# EAGLE board LAMPS (EAGLE 6.3)
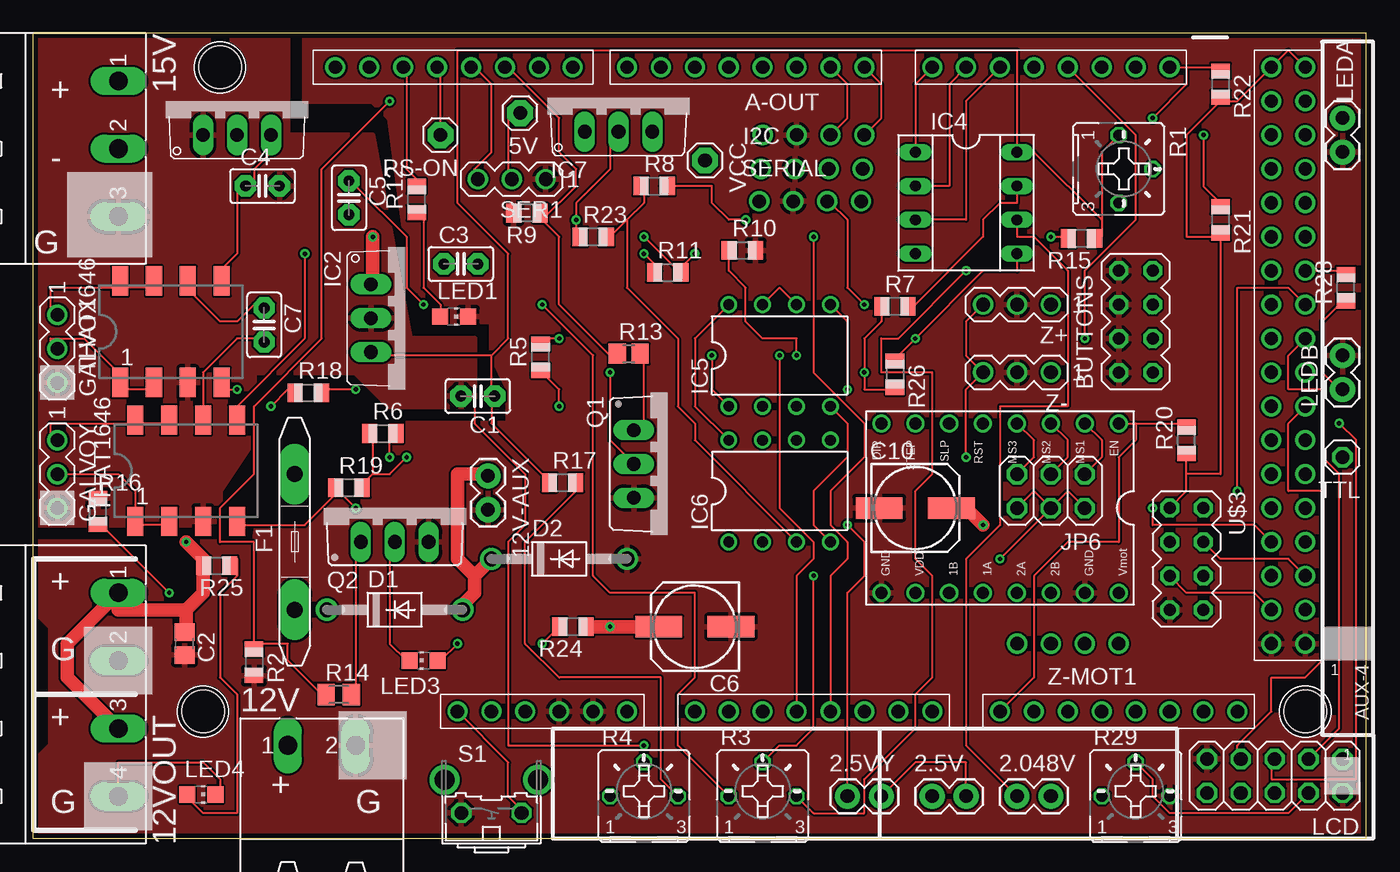
[diagram p0: board, top side]
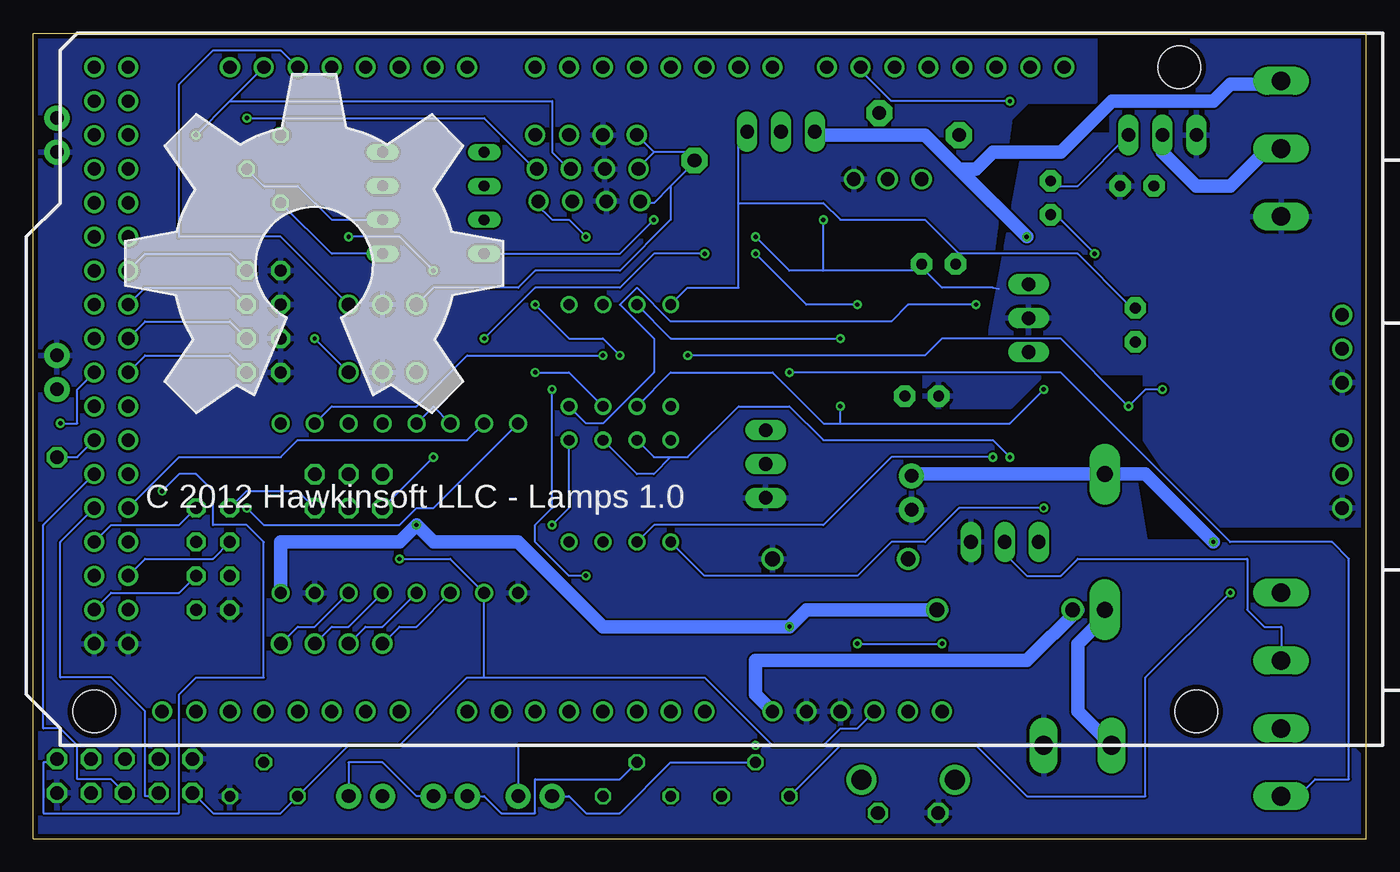
[diagram p1: board, bottom side, seen from below]

Size 99.82 x 60.32 mm. Coordinates in mm from the lower left corner, seen from the top.
Outline: 99.82,60.31 99.82,0 0,0 0,60.31
Outline: 99.82,60.32 0.01,60.32
Copper layers (1*16): Top 0.0356mm / dielectric 1.5011mm / Bottom 0.0356mm
Design rules "LaenPCBOrder": minimum track width 6mil, minimum drill 13mil, track to track 6mil, track to pad 6mil, pad to pad 6mil, via to via 6mil, smd to smd 6mil, copper to edge 15mil, drill to drill 6mil, minimum pad ring 7mil, minimum via ring 7mil, stop-mask expansion 4mil, vias tented up to drill 0mil, thermal gap 10mil
Net classes: 1 power: width 1.016 mm

## Footprints (pad centres in the part's own frame; a part is rotated, then mirrored left to right if it is on the bottom)
1X02 = drill 1.016 pad 1.88: 1 0,0; 2 2.54,0
1X01 = drill 1.016 pad 1.93 octagon: 1 0,0
MSTBA2 = drill 1.397 long: 1 -2.54,5.08; 2 2.54,5.08
MSTBA4 = drill 1.397 long: 1 -7.62,5.08; 2 -2.54,5.08; 3 2.54,5.08; 4 7.62,5.08
MSTBA3 = drill 1.397 long: 1 -5.08,5.08; 2 0,5.08; 3 5.08,5.08
TO220V = drill 1.016 long: 1 -2.54,-2.54; 2 0,-2.54; 3 2.54,-2.54
1X04 = drill 1.016: 1 -2.54,0; 2 0,0; 3 2.54,0; 4 5.08,0
2X4 = drill 0.9 pad 1.422 octagon: 1 -3.81,-1.27; 2 -3.81,1.27; 3 -1.27,-1.27; 4 -1.27,1.27; 5 1.27,-1.27; 6 1.27,1.27; 7 3.81,-1.27; 8 3.81,1.27
C2.5-2 = drill 0.813 pad 1.6 octagon: 1 -1.27,0; 2 1.27,0
C0805 = smd 1.3 x 1.5: 1 -0.85,0; 2 0.85,0
153CLV-0605 = smd 3.5 x 1.6: + 2.7,0; - -2.7,0
DO41-10 = drill 1.118: A 5.08,0; C -5.08,0
MFR500 = drill 1.2 pad 2.3 long: 1 -5.08,0; 2 5.08,0
3PIN-HEADER = drill 1.016: 1 -2.54,0; 2 0,0; 3 2.54,0
SOCKET-08 = drill 0.813 long: 1 -3.81,-3.81; 2 -1.27,-3.81; 3 1.27,-3.81; 4 3.81,-3.81; 5 3.81,3.81; 6 1.27,3.81; 7 -1.27,3.81; 8 -3.81,3.81
DIL08 = drill 0.813 pad 1.27: 1 -3.81,-3.81; 2 -1.27,-3.81; 3 1.27,-3.81; 4 3.81,-3.81; 5 3.81,3.81; 6 1.27,3.81; 7 -1.27,3.81; 8 -3.81,3.81
2X03 = drill 1.016 octagon: 1 -2.54,-1.27; 2 -2.54,1.27; 3 0,-1.27; 4 0,1.27; 5 2.54,-1.27; 6 2.54,1.27
2X05 = drill 1.016 octagon: 1 -5.08,-1.27; 2 -5.08,1.27; 3 -2.54,-1.27; 4 -2.54,1.27; 5 0,-1.27; 6 0,1.27; 7 2.54,-1.27; 8 2.54,1.27; 9 5.08,-1.27; 10 5.08,1.27
CHIP-LED0805 = smd 1.2 x 1.2: A 0,-1.05; C 0,1.05
TO220BV = drill 1.016 long: D 0,-2.54; G -2.54,-2.54; S 2.54,-2.54
B25P = drill 0.813 octagon: A -2.54,0; E 2.54,0; S 0,2.54
R0805 = smd 1.1 x 1.4: 1 -1,0; 2 1,0
R0805' = smd 1.3 x 1.5: 1 -0.85,0; 2 0.85,0
M0805 = smd 1.3 x 1.6: 1 -0.95,0; 2 0.95,0
B3F-31XX = drill 1.016 octagon: 1 -2.261,-1.245; 2 2.261,-1.245 | drill 1.499 pad 2.159: 3 -3.505,1.245; 4 3.505,1.245
1X01' = drill 1.016 octagon: 1 0,0
ARDUINO_MEGA_SHIELD = drill 1 pad 1.422: 3.3V 35.56,2.54; 5V@0 38.1,2.54; 5V@1 93.98,50.8; 5V@2 96.52,50.8; A0 50.8,2.54; A1 53.34,2.54; A2 55.88,2.54; A3 58.42,2.54; A4 60.96,2.54; A5 63.5,2.54; A6 66.04,2.54; A7 68.58,2.54; A8 73.66,2.54; A9 76.2,2.54; A10 78.74,2.54; A11 81.28,2.54; A12 83.82,2.54; A13 86.36,2.54; A14 88.9,2.54; A15 91.44,2.54; AREF 23.876,50.8; D2 58.42,50.8; D3 55.88,50.8; D4 53.34,50.8; D5 50.8,50.8; D6 48.26,50.8; D7 45.72,50.8; D8 41.656,50.8; D9 39.116,50.8; D10 36.576,50.8; D11 34.036,50.8; D12 31.496,50.8; D13 28.956,50.8; D14 68.58,50.8; D15 71.12,50.8; D16 73.66,50.8; D17 76.2,50.8; D18 78.74,50.8; D19 81.28,50.8; D20 83.82,50.8; D21 86.36,50.8; D22 93.98,48.26; D23 96.52,48.26; D24 93.98,45.72; D25 96.52,45.72; D26 93.98,43.18; D27 96.52,43.18; D28 93.98,40.64; D29 96.52,40.64; D30 93.98,38.1; D31 96.52,38.1; D32 93.98,35.56; D33 96.52,35.56; D34 93.98,33.02; D35 96.52,33.02; D36 93.98,30.48; D37 96.52,30.48; D38 93.98,27.94; D39 96.52,27.94; D40 93.98,25.4; D41 96.52,25.4; D42 93.98,22.86; D43 96.52,22.86; D44 93.98,20.32; D45 96.52,20.32; D46 93.98,17.78; D47 96.52,17.78; D48 93.98,15.24; D49 96.52,15.24; D50 93.98,12.7; D51 96.52,12.7; D52 93.98,10.16; D53 96.52,10.16; GND@0 40.64,2.54; GND@1 43.18,2.54; GND@2 26.416,50.8; GND@3 93.98,7.62; GND@4 96.52,7.62; RES 33.02,2.54; RX 63.5,50.8; TX 60.96,50.8; VIN 45.72,2.54 | hole 3.2: 96.52,2.54; 13.97,2.54; 15.24,50.8
THAT1646 = smd 1.2 x 2.2: 1 -3.81,-3.8; 2 -1.27,-3.8; 3 1.27,-3.8; 4 3.81,-3.8; 5 3.81,3.8; 6 1.27,3.8; 7 -1.27,3.8; 8 -3.81,3.8
A4988BREAKOUT = drill 0.9: 1A 8.89,1.27; 1B 11.43,1.27; 2A 6.35,1.27; 2B 3.81,1.27; DIR 16.51,-11.43; EN -1.27,-11.43; GND 16.51,1.27; GND@0 1.27,1.27; MS1 1.27,-11.43; MS2 3.81,-11.43; MS3 6.35,-11.43; RST 8.89,-11.43; SLP 11.43,-11.43; STEP 13.97,-11.43; VDD 13.97,1.27; VMOT -1.27,1.27

## Placement (x,y rotation side)
2.5V  [1X02]  67.32,3.17 0 top
2.5VY  [1X02]  60.97,3.17 0 top
2.048V  [1X02]  73.67,3.17 0 top
5V  [1X01]  36.46,54.36 180 top
12V  MSTBA2  [MSTBA2]  21.6,1.9 0 top
12V-AUX  [1X02]  34.05,27.18 270 top
12VOUT  MSTBA4  [MSTBA4]  1.28,10.79 270 top
15V  MSTBA3  [MSTBA3]  1.28,51.69 270 top
!!!SCHEMATICDOESNOTREFLECTDESIGN  7906  [TO220V]  15.25,55.24 0 top
A-OUT  [1X04]  57.16,52.7 0 top
BUTTONS  M04X2  [2X4]  82.56,38.73 90 top
C1  0.1uF  [C2.5-2]  33.29,33.15 180 top
C2  100nF  [C0805]  11.32,14.6 270 top
C3  0.1uF  [C2.5-2]  32.02,43.05 0 top
C4  0.1uF  [C2.5-2]  17.16,48.89 0 top
C5  1uF  [C2.5-2]  23.63,48.01 270 top
C6  100uF  [153CLV-0605]  49.54,15.87 180 top
C7  1uF  [C2.5-2]  17.28,38.48 270 top
C10  100uF  [153CLV-0605]  66.05,24.77 0 top
D1  1N4004  [DO41-10]  27.06,17.14 0 top
D2  1N4004  [DO41-10]  39.38,20.95 0 top
F1  MFR500  [MFR500]  19.57,22.23 270 top
GALVOX  [3PIN-HEADER]  1.79,36.7 270 top
GALVOY  [3PIN-HEADER]  1.79,27.3 270 top
I2C  [1X04]  57.04,50.16 0 top
IC2  7805TV  [TO220V]  27.83,38.99 270 top
IC4  TLV5618  [SOCKET-08]  69.86,47.62 270 top
IC5  TL082P  [DIL08]  55.89,36.2 0 top
IC6  TL082P  [DIL08]  55.89,26.03 0 top
IC7  7806TV  [TO220V]  43.83,55.5 0 top
JP6  [2X03]  76.21,26.03 180 top
LCD  [2X05]  92.98,4.7 180 top
LED1  [CHIP-LED0805]  31.51,39.12 270 top
LED3  [CHIP-LED0805]  29.22,13.33 90 top
LED4  [CHIP-LED0805]  12.59,3.3 270 top
LEDA  [1X02]  98.06,53.97 270 top
LEDB  [1X02]  98.06,33.65 90 top
PS-ON  [1X01]  30.49,52.7 180 top
Q1  STP55NF06L  [TO220BV]  47.51,28.07 270 top
Q2  STP55NF06L  [TO220BV]  27.06,24.77 0 top
R1  20k  [B25P]  81.29,50.16 270 top
R2  100k  [R0805]  16.52,13.21 270 top
R3  1k  [B25P]  54.62,3.17 0 top
R4  1k  [B25P]  45.73,3.17 0 top
R5  100k  [R0805]  37.99,36.07 90 top
R6  100k  [R0805]  26.17,30.35 0 top
R7  100k  [R0805]  64.53,39.88 0 top
R8  100k  [R0805]  46.49,48.89 0 top
R9  100k  [R0805]  36.97,46.86 180 top
R10  100k  [R0805]  53.1,44.07 0 top
R11  10k  [R0805]  47.51,42.42 0 top
R12  1K  [R0805]  28.71,47.88 90 top
R13  10r  [R0805']  44.59,36.32 0 top
R14  10r  [M0805]  22.87,10.79 0 top
R15  10k  [R0805]  78.5,44.96 180 top
R16  10k  [R0805]  4.84,24.51 90 top
R17  10k  [R0805]  39.64,26.67 0 top
R18  200k  [R0805]  20.59,33.4 0 top
R19  200k  [R0805]  23.63,26.29 0 top
R20  10k  [R0805]  86.37,29.84 90 top
R21  4.7K  [R0805]  88.91,46.35 270 top
R22  4.7K  [R0805]  88.91,56.51 270 top
R23  200k  [R0805]  41.92,45.09 0 top
R24  1.8K  [R0805]  40.4,15.87 180 top
R25  1.8K  [R0805]  13.73,20.45 0 top
R26  200k  [R0805]  64.53,34.8 270 top
R28  1K  [R0805]  98.31,41.27 90 top
R29  1k  [B25P]  82.56,3.17 0 top
S1  [B3F-31XX]  34.3,3.17 0 top
SER1  [3PIN-HEADER]  35.83,49.4 180 top
SERIAL  [1X04]  56.91,47.75 0 top
TTL  [1X01']  98.06,28.57 180 top
U1  ARDUINO_MEGA_SHIELD  [ARDUINO_MEGA_SHIELD]  -1.26,6.98 0 top
U$1  THAT1646  [THAT1646]  10.3,37.97 0 top
U$2  [OSHW_FILLX1000_NOTEXT]  92.98,31.88 0 bottom
U$3  M04X2  [2X4]  86.37,20.95 270 top
U$4  THAT1646  [THAT1646]  11.44,27.56 0 top
U$8  A4988BREAKOUT  [A4988BREAKOUT]  80.02,19.69 180 top
VCC  [1X01]  50.3,50.8 270 top
Z+  [3PIN-HEADER]  73.67,40 180 top
Z-  [3PIN-HEADER]  73.67,34.92 180 top
Z-MOT1  [1X04]  78.75,14.6 180 top

## Library data of the parts
2.5V 2.5VY 2.048V 12V-AUX BUTTONS LEDA LEDB U$3 = SparkFun; OC_NEWARK: unknown
5V C6 C10 PS-ON R2 R5-R12 R15-R26 R28 VCC = adafruit; OC_NEWARK: unknown
12V = con-phoenix-508; MF: FARNELL; MPN: 1757242; OC_FARNELL: 3705171; OC_NEWARK: 71C4161
12VOUT = con-phoenix-508; OC_FARNELL: 3705195; OC_NEWARK: unknown
15V = con-phoenix-508; MF: FARNELL; MPN: 1757255; OC_FARNELL: 3705183; OC_NEWARK: 71C4162
!!!SCHEMATICDOESNOTREFLECTDESIGN = linear; MPN: KA7906TU; OC_NEWARK: 94M7930
A-OUT F1 I2C SERIAL U1 U$8 Z-MOT1 = RepRapjr; OC_NEWARK: unknown
C1 C3-C5 C7 = capacitor-wima; OC_NEWARK: unknown
C2 R13 R14 = resistor; OC_NEWARK: unknown
D1 D2 = diode; OC_NEWARK: unknown
GALVOX GALVOY SER1 Z+ Z- = ultimachine; OC_NEWARK: unknown
IC2 IC5-IC7 = linear; OC_NEWARK: unknown
IC4 = ic-package; MF: TEXAS INSTRUMENT CONNECTORS; MPN: TLV5618AIP; OC_NEWARK: 76C8920
JP6 LCD TTL = pinhead; OC_NEWARK: unknown
LED1 LED3 LED4 = led; OC_NEWARK: unknown
Q1 Q2 = transistor-power; MF: INTERNATIONAL RECTIFIER(IR); MPN: IRF1010EZPBF; OC_NEWARK: 63J7168
R1 R3 R4 R29 = pot; OC_NEWARK: unknown
S1 = switch-omron; OC_FARNELL: 959704; OC_NEWARK: unknown
U$1 U$4 = THAT1646; MPN: THAT1646P08-U; OC_NEWARK: 50M5186
U$2 = ohw-logo

## Nets
+5V: 5V.1 SER1.2
+12V [power]: 12V-AUX.1 12VOUT.1 12VOUT.3 C2.1 C6.+ C10.+ D1.A D2.C F1.1 R24.1 R25.1 U$8.VMOT
A3: SERIAL.3 U1.A3
A4: SERIAL.4 U1.A4
A5: U1.A5
A9: U1.A9
A10: U1.A10
A11: U1.A11
A12: U1.A12
AM-VIN [power]: D1.C U1.VIN
D1: A-OUT.4 U1.RX
D2: A-OUT.3 U1.TX
D4: U1.D4
D5: U1.D5
D6: U1.D6
D8: U1.D8
D9: R2.1 R14.1 U1.D9
D10: R9.1 R13.1 U1.D10
D11: SER1.3 U1.D11
D12: PS-ON.1 U1.D12
D14: IC4.1 U1.D14
D15: IC4.2 U1.D15
D16: IC4.3 U1.D16
D17: U1.D17
D23: U1.D23
D25: U1.D25
D27: U1.D27
D29: U1.D29
D31: U1.D31
D32: BUTTONS.7 U1.D32
D33: R28.2 U1.D33
D34: BUTTONS.5 U1.D34
D35: LCD.1 U1.D35
D36: BUTTONS.3 U1.D36
D37: LCD.3 U1.D37
D38: BUTTONS.1 U1.D38
D39: LCD.5 U1.D39
D40: U1.D40
D41: LCD.7 U1.D41
D42: U1.D42
D43: TTL.1 U1.D43
D44: U1.D44
D45: LCD.6 U1.D45
D47: LCD.8 U1.D47
D49: U1.D49 U$3.2
D53: U1.D53 U$3.6
E0-DIR: U1.D28
E0-EN: U1.D24
E0-STEP: U1.D26
E1-EN: U1.D30
GND: 12V-AUX.2 12V.2 A-OUT.2 BUTTONS.2 BUTTONS.4 BUTTONS.6 BUTTONS.8 C2.2 C6.- C10.- D2.A I2C.2 LCD.2 LCD.9 LED1.C LEDA.2 LEDB.2 Q1.S Q2.S R2.2 R9.2 R10.2 R29.E S1.1 SER1.1 SERIAL.2 U1.GND@0 U1.GND@1 U1.GND@3 U1.GND@4 U$3.7 U$8.GND U$8.GND@0 Z+.2 Z-.2
GND_0: 2.5V.2 2.5VY.2 2.048V.2 15V.3 !!!SCHEMATICDOESNOTREFLECTDESIGN.1 C1.2 C3.2 C4.2 GALVOX.3 GALVOY.3 IC2.2 IC4.5 IC7.2 R1.E R11.2 R16.2 R23.1 R26.1 U$1.3 U$4.3
LED: R12.2 U1.D13
MISO: U1.D50 U$3.3
MOSI: U1.D51 U$3.4
N$1: 12VOUT.2 LED3.C Q2.D
N$2 [power]: 15V.1 IC2.1 IC7.1
N$3 [power]: 15V.2 !!!SCHEMATICDOESNOTREFLECTDESIGN.2
N$4: R4.A R16.1
N$5: R4.E R17.2
N$6: 2.048V.1 IC4.6 R1.S
N$7: 12VOUT.4 LED4.C Q1.D
N$8: R3.A R11.1
N$9: R3.E R15.2
N$10: 2.5VY.1 IC6.5 R4.S
N$11: 2.5V.1 IC5.5 R3.S
N$12: GALVOX.2 U$1.1 U$1.2
N$13: GALVOX.1 U$1.7 U$1.8
N$14: IC5.6 IC5.7 R5.2
N$15: IC5.2 R5.1 R18.2
N$16: IC4.7 R7.2
N$17: IC5.3 R7.1 R26.2
N$18: IC6.6 IC6.7 R6.2
N$20: IC6.2 R6.1 R19.2
N$21: IC4.4 R8.2
N$22: IC6.3 R8.1 R23.2
N$23: LEDB.1 R28.1
N$24: GALVOY.2 U$4.1 U$4.2
N$25: GALVOY.1 U$4.7 U$4.8
N$29: LCD.4 R29.S
N$37: JP6.3 U$8.MS2
N$38: U$8.RST U$8.SLP
N$39: JP6.5 U$8.MS3
N$40: JP6.1 R10.1 U$8.MS1
N$41: U$8.2B Z-MOT1.1
N$42: U$8.2A Z-MOT1.2
N$43: U$8.1A Z-MOT1.3
N$44: U$8.1B Z-MOT1.4
N$45: LED3.A R24.2
N$46: LED1.A R12.1
N$47: Q2.G R14.2
N$48: Q1.G R13.2
N$50: LED4.A R25.2
N$54 [power]: 12V.1 F1.2
NEG_6V: !!!SCHEMATICDOESNOTREFLECTDESIGN.3 C4.1 C5.1 IC5.4 IC6.4 U$1.5
POS_5V: C1.1 IC2.3 IC4.8 R1.A R15.1 R17.1
POS_6V: C3.1 C7.1 IC5.8 IC6.8 IC7.3 U$1.6
RESET: S1.2 U1.RES
SCK: U1.D52 U$3.5
SCL: I2C.4 R22.1 U1.D21
SDA: I2C.3 R21.1 U1.D20
T2_5: C5.2 U$4.5
T2_6: C7.2 U$4.6
THERM0: U1.A13
THERM1: U1.A14
THERM2: U1.A15
VCC: A-OUT.1 I2C.1 JP6.2 JP6.4 JP6.6 LCD.10 R20.1 R21.2 R22.2 R29.A SERIAL.1 U1.5V@0 U1.5V@1 U1.5V@2 U$3.1 U$8.VDD VCC.1 Z+.3 Z-.3
X-DIR: U1.A1
X-MAX: U1.D2
X-MIN: U1.D3
X-STEP: U1.A0
X_IN: IC5.1 R18.1 U$1.4
Y-DIR: U1.A7
Y-EN: U1.A2
Y-STEP: U1.A6
Y_IN: IC6.1 R19.1 U$4.4
Z-DIR: U1.D48 U$8.DIR
Z-EN: R20.2 U1.A8 U$8.EN
Z-MAX: U1.D19 Z+.1
Z-MIN: U1.D18 Z-.1
Z-STEP: U1.D46 U$8.STEP

## Tracks (layer width: path | path; a pad name or v marks a point on that pad's centre or on a via)
+5V
  Top 0.152: SER1.2 35.57,48.89 35.57,53.97 5V.1
+12V  (via drill 0.33)
  Top 1.016: v71.13,23.49 69.86,24.77 C10.+ | 12.71,20.95 12.71,18.41 11.44,17.14 | 11.44,17.14 11.44,15.87 C2.1 | 11.44,17.14 6.36,17.14 12VOUT.1 2.55,14.6 2.55,12.06 12VOUT.3 | C6.+ v43.19,15.87 R24.1 | 33.03,19.69 33.03,18.41 31.76,17.14 D1.A | D2.C 33.03,19.69 | 33.03,19.69 31.76,20.95 31.76,27.3 34.3,27.3 12V-AUX.1 | v11.44,22.23 12.71,20.95 | 12.71,20.95 R25.1
  Bottom 1.016: U$8.VMOT 81.29,22.23 72.4,22.23 v71.13,23.49 69.86,22.23 63.51,22.23 57.16,15.87 v43.19,15.87 41.92,17.14 D1.A 31.76,17.14 | 12V-AUX.1 34.3,27.3 F1.1 16.52,27.3 v11.44,22.23
A3  (via drill 0.33)
  Top 0.152: U1.A3 57.16,19.69 58.43,20.95 58.43,22.23 55.89,24.77 v55.89,36.2 | v62.24,40 60.97,41.27 60.97,46.35 59.7,47.62 SERIAL.3
  Bottom 0.152: v55.89,36.2 57.16,37.46 59.7,37.46 v62.24,40
A4  (via drill 0.33)
  Top 0.152: U1.A4 59.7,19.69 60.97,20.95 60.97,22.23 59.7,23.49 59.7,26.03 62.24,28.57 62.24,31.11 58.43,34.92 v58.43,45.09
  Bottom 0.152: v58.43,45.09 59.7,46.35 60.97,46.35 62.24,47.62 SERIAL.4
AM-VIN
  Bottom 1.016: U1.VIN 45.73,10.79 45.73,13.33 25.41,13.33 21.6,17.14 D1.C
D1
  Top 0.152: U1.RX 63.51,56.51 63.51,53.97 A-OUT.4
D2
  Top 0.152: U1.TX 60.97,56.51 60.97,53.97 A-OUT.3
D9  (via drill 0.33)
  Top 0.152: 16.52,14.6 19.06,14.6 19.06,13.33 21.6,10.79 R14.1 | v26.68,55.24 21.6,50.16 21.6,37.46 16.52,32.38 16.52,27.3 13.98,24.77 13.98,22.23 16.52,22.23 16.52,14.6 | 16.52,14.6 R2.1
  Bottom 0.152: v26.68,55.24 35.57,55.24 38.11,57.79 U1.D9
D10
  Top 0.152: 38.11,46.35 39.38,45.09 39.38,40 43.19,36.2 R13.1 | 38.11,46.35 40.65,48.89 40.65,50.16 39.38,51.43 39.38,53.97 35.57,57.79 U1.D10 | 38.11,46.35 R9.1
D11
  Top 0.152: U1.D11 33.03,57.79 34.3,56.51 34.3,51.43 33.03,50.16 33.03,48.89 SER1.3
D12
  Top 0.152: PS-ON.1 30.49,57.79 U1.D12
D14
  Top 0.152: IC4.1 66.05,56.51 U1.D14
D15
  Top 0.152: IC4.2 68.59,48.89 68.59,56.51 U1.D15
D16
  Top 0.152: IC4.3 69.86,46.35 69.86,55.24 U1.D16
D32
  Bottom 0.152: BUTTONS.7 85.1,43.81 91.45,43.81 U1.D32
D33
  Top 0.152: U1.D33 97.8,42.54 R28.2
D34
  Bottom 0.152: BUTTONS.5 85.1,41.27 91.45,41.27 U1.D34
D35  (via drill 0.33)
  Top 0.152: U1.D35 93.99,41.27 90.18,41.27 v90.18,26.03
  Bottom 0.152: v90.18,26.03 88.91,27.3 87.64,27.3 86.37,26.03 86.37,23.49 83.83,23.49 82.56,22.23 82.56,12.06 87.64,12.06 88.91,10.79 88.91,1.9 99.07,1.9 99.07,5.71 97.8,5.71 LCD.1
D36
  Bottom 0.152: BUTTONS.3 85.1,38.73 91.45,38.73 U1.D36
D37
  Top 0.152: U1.D37 93.99,36.2 93.99,33.65 96.53,33.65 96.53,28.57 97.8,27.3 97.8,8.26 LCD.3 95.26,5.71
D38
  Bottom 0.152: BUTTONS.1 85.1,36.2 91.45,36.2 U1.D38
D39  (via drill 0.33)
  Top 0.152: v97.8,31.11 99.07,29.84 99.07,4.44 92.72,4.44 92.72,5.71 LCD.5
  Bottom 0.152: U1.D39 96.53,33.65 96.53,31.11 v97.8,31.11
D41
  Top 0.152: U1.D41 93.99,31.11 93.99,26.03 96.53,26.03 96.53,13.33 95.26,12.06 92.72,12.06 92.72,9.53 90.18,6.98 90.18,5.71 LCD.7
D43
  Bottom 0.152: U1.D43 96.53,28.57 TTL.1
D45
  Bottom 0.152: U1.D45 99.07,23.49 99.07,8.26 97.8,8.26 96.53,6.98 96.53,4.44 93.99,4.44 LCD.6 92.72,3.17
D47
  Bottom 0.152: U1.D47 97.8,22.23 97.8,12.06 93.99,12.06 91.45,9.53 91.45,3.17 90.18,3.17 LCD.8
D49
  Bottom 0.152: U$3.2 88.91,23.49 93.99,23.49 U1.D49
D53
  Bottom 0.152: U$3.6 88.91,18.41 93.99,18.41 U1.D53
GND
  pour Top: 100.34,60.32 20.33,60.32 20.33,55.24 25.41,55.24 26.68,53.97 28.71,38.73 34.3,38.73 34.3,36.2 35.57,33.65 35.57,31.11 26.68,31.11 22.87,33.65 17.79,33.65 17.79,29.84 16.52,22.23 -1.26,22.23 -1.26,18.41 1.28,15.87 1.28,6.98 -1.26,4.44 -1.26,-0.64 100.34,-0.64
  pour Bottom: 100.34,60.32 20.33,60.32 20.33,55.24 25.41,55.24 26.68,53.97 28.71,38.73 34.3,38.73 34.3,36.2 35.57,33.65 35.57,31.11 26.68,31.11 22.87,33.65 17.79,33.65 17.79,29.84 16.52,22.23 -1.26,22.23 -1.26,18.41 1.28,15.87 1.28,6.98 -1.26,4.44 -1.26,-0.64 100.34,-0.64
GND_0  (via drill 0.33)
  Top 0.152: IC4.5 73.67,42.54 71.13,42.54 v66.05,37.46 64.78,36.2 R26.1 | R23.1 40.65,45.09 v40.65,46.35 40.65,47.62 43.19,50.16 43.19,52.7 IC7.2 | v45.73,45.09 48.27,42.54 | 2.5VY.2 66.05,5.71 69.86,5.71 2.5V.2 | v45.73,6.98 35.57,6.98 35.57,22.23 36.84,23.49 36.84,27.3 33.03,31.11 33.03,33.91 | 48.27,42.54 v49.54,43.81 | 48.27,42.54 R11.2
  Bottom 0.152: R1.E 77.48,43.81 IC4.5 | v45.73,45.09 43.19,42.54 40.65,42.54 | 33.03,42.54 40.65,42.54 | 40.65,42.54 v40.65,46.35 | 2.048V.2 76.21,5.71 73.67,5.71 71.13,3.17 2.5V.2 | 2.5VY.2 63.51,6.98 v45.73,6.98 | 33.03,42.54 31.76,41.27 27.95,41.27 27.52,41.2 | 33.03,42.54 C3.2 | v66.05,37.46 62.24,41.27 55.89,41.27 53.35,43.81 v49.54,43.81
  pour Top: 19.06,60.32 -1.26,60.32 -1.26,23.49 13.98,23.49 13.98,26.03 16.52,29.84 16.52,34.92 24.14,34.92 26.68,32.38 33.03,32.38 33.03,37.46 28.21,37.46 25.41,52.7 19.06,52.7
  pour Bottom: 19.06,60.32 -1.26,60.32 -1.26,23.49 13.98,23.49 13.98,26.03 16.52,29.84 16.52,34.92 24.14,34.92 26.68,32.38 33.03,32.38 33.03,37.46 28.21,37.46 25.41,52.7 19.06,52.7
LED
  Top 0.152: R12.2 29.22,48.89 27.95,50.16 27.95,57.79 U1.D13
MISO
  Bottom 0.152: U$3.3 86.37,20.95 91.45,20.95 U1.D50
MOSI
  Top 0.152: U$3.4 88.91,20.95 93.99,20.95 U1.D51
N$1
  Top 0.152: LED3.C 27.95,13.33 26.68,14.6 26.68,22.23 Q2.D
  Bottom 0.152: 12VOUT.2 6.36,15.87 7.63,15.87 8.9,17.14 8.9,20.95 21.6,20.95 22.87,19.69 25.41,19.69 26.68,20.95 26.68,22.23 Q2.D
N$2  (via drill 0.33)
  Top 1.016: v25.41,45.09 25.41,41.27 IC2.1
  Bottom 1.016: 30.49,50.16 33.03,52.7 40.65,52.7 IC7.1 | 30.49,50.16 v25.41,45.09 | 30.49,50.16 29.22,50.16 27.95,51.43 22.87,51.43 19.06,55.24 11.44,55.24 10.17,56.51 6.36,56.51 15V.1
N$3
  Bottom 1.016: !!!SCHEMATICDOESNOTREFLECTDESIGN.2 15.25,51.43 12.71,48.89 10.17,48.89 7.63,51.43 6.36,51.43 15V.2
N$4  (via drill 0.33)
  Top 0.152: v10.17,18.41 5.09,23.49 R16.1
  Bottom 0.152: v10.17,18.41 16.52,12.06 16.52,3.17 25.41,3.17 29.22,6.98 39.38,6.98 R4.A
N$5
  Top 0.152: R4.E 47,4.44 47,12.06 39.38,12.06 36.84,14.6 36.84,22.23 40.65,26.03 R17.2
N$6
  Top 0.152: 2.048V.1 69.86,6.98 69.86,20.95 72.4,23.49 72.4,32.38 77.48,32.38 77.48,42.54 74.94,45.09 73.67,45.09 IC4.6
  Bottom 0.152: IC4.6 77.48,46.35 80.02,48.89 82.56,48.89 R1.S
N$7  (via drill 0.33)
  Top 0.152: 12VOUT.4 6.36,5.71 12.71,5.71 13.98,4.44 13.98,3.17 LED4.C | Q1.D 43.19,29.84 v43.19,34.92
  Bottom 0.152: v43.19,34.92 22.87,34.92 10.17,22.23 2.55,22.23 1.28,20.95 1.28,4.44 3.82,4.44 5.09,3.17 12VOUT.4
N$8  (via drill 0.33)
  Top 0.152: v45.73,43.81 47,42.54 R11.1 | v38.11,40 41.92,36.2 41.92,19.69 43.19,18.41 49.54,18.41 49.54,12.06 48.27,10.79 48.27,6.98 R3.A
  Bottom 0.152: v45.73,43.81 41.92,40 v38.11,40
N$9  (via drill 0.33)
  Top 0.152: v76.21,45.09 77.48,45.09 R15.2 | v69.86,42.54 64.78,37.46 63.51,37.46 63.51,34.92 67.32,34.92 67.32,27.3 66.05,26.03 66.05,20.95 67.32,19.69 67.32,12.06 66.05,10.79 66.05,8.26 62.24,4.44 62.24,1.9 58.43,1.9 R3.E
  Bottom 0.152: v76.21,45.09 72.4,45.09 v69.86,42.54
N$10  (via drill 0.33)
  Top 0.152: v60.97,23.49 62.24,22.23 62.24,19.69 60.97,18.41 2.5VY.1
  Bottom 0.152: R4.S 52.08,5.71 55.89,1.9 58.43,1.9 59.7,3.17 2.5VY.1 | IC6.5 59.7,24.77 v60.97,23.49
N$11  (via drill 0.33)
  Top 0.152: IC5.5 60.97,38.73 v60.97,33.65 | v58.43,19.69 58.43,8.26 57.16,6.98 55.89,6.98 R3.S
  Bottom 0.152: R3.S 55.89,4.44 62.24,4.44 62.24,1.9 64.78,1.9 66.05,3.17 2.5V.1 | v60.97,33.65 60.97,24.77 62.24,23.49 62.24,22.23 59.7,19.69 v58.43,19.69
N$12
  Top 0.152: U$1.2 8.9,33.65 6.36,33.65 U$1.1 6.36,34.92 3.82,37.46 1.28,37.46 1.28,36.2 GALVOX.2
N$13
  Top 0.152: 6.36,41.27 8.9,41.27 U$1.7 | 6.36,41.27 1.28,41.27 1.28,38.73 GALVOX.1 | 6.36,41.27 U$1.8
N$14  (via drill 0.33)
  Top 0.152: v39.38,37.46 38.11,37.46 R5.2 | IC5.6 55.89,41.27 IC5.7
  Bottom 0.152: v39.38,37.46 52.08,37.46 IC5.7
N$15  (via drill 0.33)
  Top 0.152: v24.14,33.65 21.6,33.65 R18.2 | v39.38,32.38 39.38,33.65 38.11,34.92 R5.1
  Bottom 0.152: v24.14,33.65 26.68,31.11 39.38,31.11 | 39.38,31.11 40.65,31.11 44.46,34.92 52.08,34.92 IC5.2 | 39.38,31.11 v39.38,32.38
N$16
  Top 0.152: IC4.7 73.67,47.62 72.4,47.62 71.13,46.35 71.13,45.09 66.05,40 R7.2
N$17  (via drill 0.33)
  Top 0.152: R26.2 64.78,33.65 62.24,33.65 v62.24,34.92 62.24,37.46 63.51,38.73 63.51,40 R7.1
  Bottom 0.152: IC5.3 59.7,34.92 v62.24,34.92
N$18  (via drill 0.33)
  Top 0.152: v26.68,28.57 26.68,29.84 R6.2
  Bottom 0.152: v26.68,28.57 27.95,29.84 40.65,29.84 43.19,32.38 47,32.38 50.81,28.57 52.08,28.57 | 52.08,28.57 53.35,28.57 IC6.7 | IC6.6 54.62,27.3 53.35,27.3 52.08,28.57
N$20  (via drill 0.33)
  Top 0.152: 25.41,27.3 24.14,26.03 R19.2 | 25.41,27.3 25.41,29.84 R6.1 | v27.95,28.57 26.68,27.3 25.41,27.3
  Bottom 0.152: IC6.2 53.35,23.49 40.65,23.49 35.57,28.57 v27.95,28.57
N$21  (via drill 0.33)
  Top 0.152: v53.35,46.35 52.08,46.35 50.81,47.62 50.81,48.89 R8.2 47,48.89
  Bottom 0.152: v53.35,46.35 55.89,43.81 IC4.4
N$22
  Top 0.152: 44.46,46.35 45.73,47.62 45.73,48.89 R8.1 | 44.46,46.35 43.19,45.09 R23.2 | IC6.3 49.54,29.84 49.54,31.11 48.27,32.38 48.27,37.46 44.46,41.27 44.46,46.35
N$23
  Top 0.152: R28.1 97.8,40 96.53,38.73 96.53,34.92 97.8,33.65 LEDB.1
N$24
  Top 0.152: U$4.2 10.17,23.49 7.63,23.49 U$4.1 7.63,26.03 6.36,27.3 GALVOY.2 1.28,27.3
N$25
  Top 0.152: 7.63,31.11 10.17,31.11 U$4.7 | 7.63,31.11 1.28,31.11 1.28,29.84 GALVOY.1 | 7.63,31.11 U$4.8
N$29
  Top 0.152: R29.S 83.83,4.44 83.83,3.17 85.1,1.9 93.99,1.9 LCD.4
N$37
  Top 0.152: U$8.MS2 77.48,29.84 77.48,28.57 JP6.3
N$38
  Bottom 0.152: U$8.SLP 69.86,32.38 U$8.RST
N$39
  Top 0.152: U$8.MS3 74.94,29.84 74.94,28.57 JP6.5
N$40  (via drill 0.33)
  Top 0.152: v57.16,36.2 57.16,37.46 54.62,37.46 53.35,38.73 53.35,41.27 52.08,42.54 52.08,43.81 R10.1 | JP6.1 80.02,28.57 80.02,29.84 U$8.MS1
  Bottom 0.152: v57.16,36.2 67.32,36.2 71.13,32.38 77.48,32.38 U$8.MS1
N$41
  Bottom 0.152: U$8.2B 78.75,15.87 80.02,15.87 Z-MOT1.1
N$42
  Bottom 0.152: U$8.2A 76.21,15.87 77.48,15.87 Z-MOT1.2
N$43
  Bottom 0.152: U$8.1A 73.67,15.87 74.94,15.87 Z-MOT1.3
N$44
  Bottom 0.152: U$8.1B 71.13,15.87 72.4,15.87 Z-MOT1.4
N$45  (via drill 0.33)
  Top 0.152: v31.76,14.6 30.49,13.33 LED3.A | v38.11,14.6 39.38,15.87 R24.2
  Bottom 0.152: v38.11,14.6 v31.76,14.6
N$46
  Top 0.152: LED1.A 30.49,38.73 30.49,40 29.22,41.27 29.22,46.35 R12.1
N$47
  Top 0.152: R14.2 24.14,10.79 24.14,22.23 Q2.G
N$48
  Top 0.152: R13.2 45.73,36.2 45.73,31.11 Q1.G
N$50
  Top 0.152: LED4.A 11.44,3.17 12.71,1.9 15.25,1.9 15.25,10.79 13.98,12.06 13.98,18.41 15.25,19.69 15.25,20.95 R25.2
N$54
  Bottom 1.016: 12V.1 21.6,9.53 21.6,14.6 19.06,17.14 F1.2
NEG_6V  (via drill 0.33)
  Top 0.152: IC6.4 58.43,23.49 58.43,26.03 60.97,28.57 60.97,31.11 IC5.4 | U$1.5 13.98,42.54 15.25,43.81 15.25,48.89 C4.1 16.52,48.89 16.52,50.16 17.79,51.43 !!!SCHEMATICDOESNOTREFLECTDESIGN.3 | v29.22,40 27.95,41.27 27.95,45.09 24.14,48.89 C5.1
  Bottom 0.152: !!!SCHEMATICDOESNOTREFLECTDESIGN.3 21.6,48.89 24.14,48.89 C5.1 | IC5.4 58.43,31.11 57.16,31.11 53.35,34.92 53.35,37.46 55.89,40 54.62,41.27 52.08,38.73 35.57,38.73 34.3,40 v29.22,40
POS_5V
  Top 0.152: 80.02,46.35 80.02,51.43 R1.A | 80.02,46.35 80.02,45.09 R15.1 | 80.02,46.35 74.94,51.43 IC4.8 73.67,59.05 31.76,59.05 31.76,47.62 35.57,43.81 35.57,37.46 34.3,36.2 | R17.1 38.11,27.3 34.3,31.11 34.3,32.38 C1.1 34.3,33.65 34.3,36.2 | 34.3,36.2 25.41,36.2 IC2.3
POS_6V
  Top 0.152: U$1.6 11.44,41.27 13.98,38.73 15.25,38.73 16.52,40 C7.1 | IC6.8 49.54,32.38 49.54,37.46 IC5.8
  Bottom 0.152: 30.49,43.81 21.6,43.81 17.79,40 C7.1 | 47,47.62 47,41.27 50.81,41.27 IC5.8 | 47,47.62 47,52.7 IC7.3 | 30.49,43.81 33.03,46.35 39.38,46.35 40.65,47.62 47,47.62 | 30.49,43.81 C3.1
RESET
  Top 0.152: U1.RES 35.57,5.71 35.57,3.17 36.84,1.9 S1.2
SCK
  Top 0.152: U$3.5 86.37,18.41 91.45,18.41 U1.D52
SCL  (via drill 0.33)
  Top 0.152: U1.D21 86.37,57.79 | 86.37,57.79 88.91,57.79 R22.1 | v83.83,53.97 86.37,56.51 86.37,57.79
  Bottom 0.152: v83.83,53.97 66.05,53.97 62.24,50.16 I2C.4
SDA  (via drill 0.33)
  Top 0.152: v87.64,52.7 87.64,48.89 88.91,47.62 R21.1
  Bottom 0.152: U1.D20 85.1,55.24 | 85.1,55.24 v87.64,52.7 | 85.1,55.24 60.97,55.24 60.97,51.43 59.7,50.16 I2C.3
T2_5  (via drill 0.33)
  Top 0.152: v20.33,43.81 20.33,37.46 15.25,32.38 U$4.5
  Bottom 0.152: v20.33,43.81 22.87,46.35 24.14,46.35 C5.2
T2_6
  Top 0.152: U$4.6 12.71,34.92 15.25,37.46 16.52,37.46 C7.2
VCC  (via drill 0.33)
  Top 0.152: Z+.3 69.86,38.73 69.86,36.2 Z-.3 69.86,33.65 v69.86,28.57 | JP6.6 74.94,26.03 JP6.4 | 86.37,27.3 86.37,26.03 U$3.1 | 86.37,27.3 R20.1 | JP6.4 77.48,26.03 JP6.2 | U1.5V@2 93.99,59.05 U1.5V@1 90.18,55.24 88.91,55.24 | 88.91,45.09 86.37,45.09 86.37,52.7 88.91,55.24 | 88.91,55.24 R22.2 | 86.37,27.3 88.91,27.3 88.91,45.09 | 88.91,45.09 R21.2 | JP6.4 v72.4,20.95
  Bottom 0.152: LCD.10 86.37,1.9 81.29,1.9 R29.A 76.21,6.98 72.4,6.98 67.32,12.06 66.05,12.06 | 66.05,12.06 U$8.VDD 68.59,20.95 v72.4,20.95 | U1.5V@0 38.11,8.26 39.38,8.26 40.65,6.98 44.46,6.98 49.54,12.06 66.05,12.06 | 52.08,48.89 50.81,50.16 VCC.1 50.81,51.43 53.35,51.43 | 52.08,48.89 53.35,47.62 54.62,47.62 SERIAL.1 | 53.35,51.43 54.62,50.16 I2C.1 | 53.35,51.43 A-OUT.1 | Z+.3 69.86,41.27 63.51,41.27 62.24,42.54 55.89,42.54 52.08,46.35 52.08,48.89 | JP6.2 80.02,26.03 83.83,26.03 U$3.1 | JP6.6 v69.86,28.57
X_IN  (via drill 0.33)
  Top 0.152: v17.79,32.38 19.06,33.65 R18.1 | v15.25,33.65 13.98,33.65 U$1.4 | IC5.1 50.81,33.65 v50.81,36.2
  Bottom 0.152: v15.25,33.65 16.52,33.65 v17.79,32.38 22.87,37.46 31.76,37.46 33.03,36.2 v50.81,36.2
Y_IN  (via drill 0.33)
  Top 0.152: 22.87,26.03 20.33,23.49 15.25,23.49 U$4.4 | 22.87,26.03 v24.14,24.77 | 22.87,26.03 R19.1
  Bottom 0.152: IC6.1 49.54,19.69 38.11,19.69 35.57,22.23 33.03,22.23 30.49,24.77 v24.14,24.77
Z-DIR  (via drill 0.33)
  Top 0.152: v83.83,24.77 83.83,23.49 91.45,23.49 U1.D48
  Bottom 0.152: U$8.DIR 69.86,24.77 71.13,24.77 72.4,23.49 82.56,23.49 v83.83,24.77
Z-EN
  Top 0.152: U$8.EN 82.56,31.11 | 82.56,31.11 86.37,31.11 R20.2 | U1.A8 74.94,12.06 74.94,19.69 77.48,22.23 81.29,22.23 81.29,28.57 82.56,29.84 82.56,31.11
Z-MAX
  Bottom 0.152: U1.D19 81.29,59.05 86.37,59.05 88.91,56.51 88.91,45.09 81.29,45.09 Z+.1
Z-MIN  (via drill 0.33)
  Top 0.152: U1.D18 82.56,52.7 82.56,46.35 78.75,42.54 v78.75,37.46
  Bottom 0.152: Z-.1 v78.75,37.46
Z-STEP
  Bottom 0.152: U$8.STEP 67.32,29.84 80.02,29.84 81.29,28.57 88.91,28.57 U1.D46
(copper drawn outside any net)
  shapes: Bottom circle x1

## Text on the board
tNames: + | - | G | + | G | + | + | G | G
bNames: C 2012 Hawkinsoft LLC - Lamps 1.0
Document: LAMPS 0.1 (Laser Arduino MEGA Pololu Shield) | GPL v3 | Reversing input power, and inserting stepper drivers incorrectly will destroy electronics. | I2C | 21 | 20 | GND | 5V | AUX-4 | D16 | D17 | D23 | D25 | D27 | D29 | D31 | D33 | 12-35V Out | D35 | - | D37 | D10 | D38 | + | D41 | - | D43 | D9 | D45 | + | AUX-3 / SPI | AUX-1 | D47 | 5A | 12-35VDC In | SCK | MISO | D32 | 5V | GND | D2 | D1 | GND | D52 | D50 | 5V | GND | + | 5V | GND | A3 | A4 | NC | D53 | MOSI | D49 | D57 | D58 | D51 | 5V | -
_tsilk: 1 | AUX-4 | 1